# Altium PCB corePCB1nohighfreq.PcbDoc (part 2 of 3)
Units mil, origin at the board's own origin, x right, y up, seen from the top; angles counter-clockwise.
Board outline 3543.31 x 3543.31 mil, 4 copper layers (Top Layer, Layer 1, Layer 2, Bottom Layer), stack 23.756 mil thick; 90 components, 166 nets, 640 pads, 463 vias.
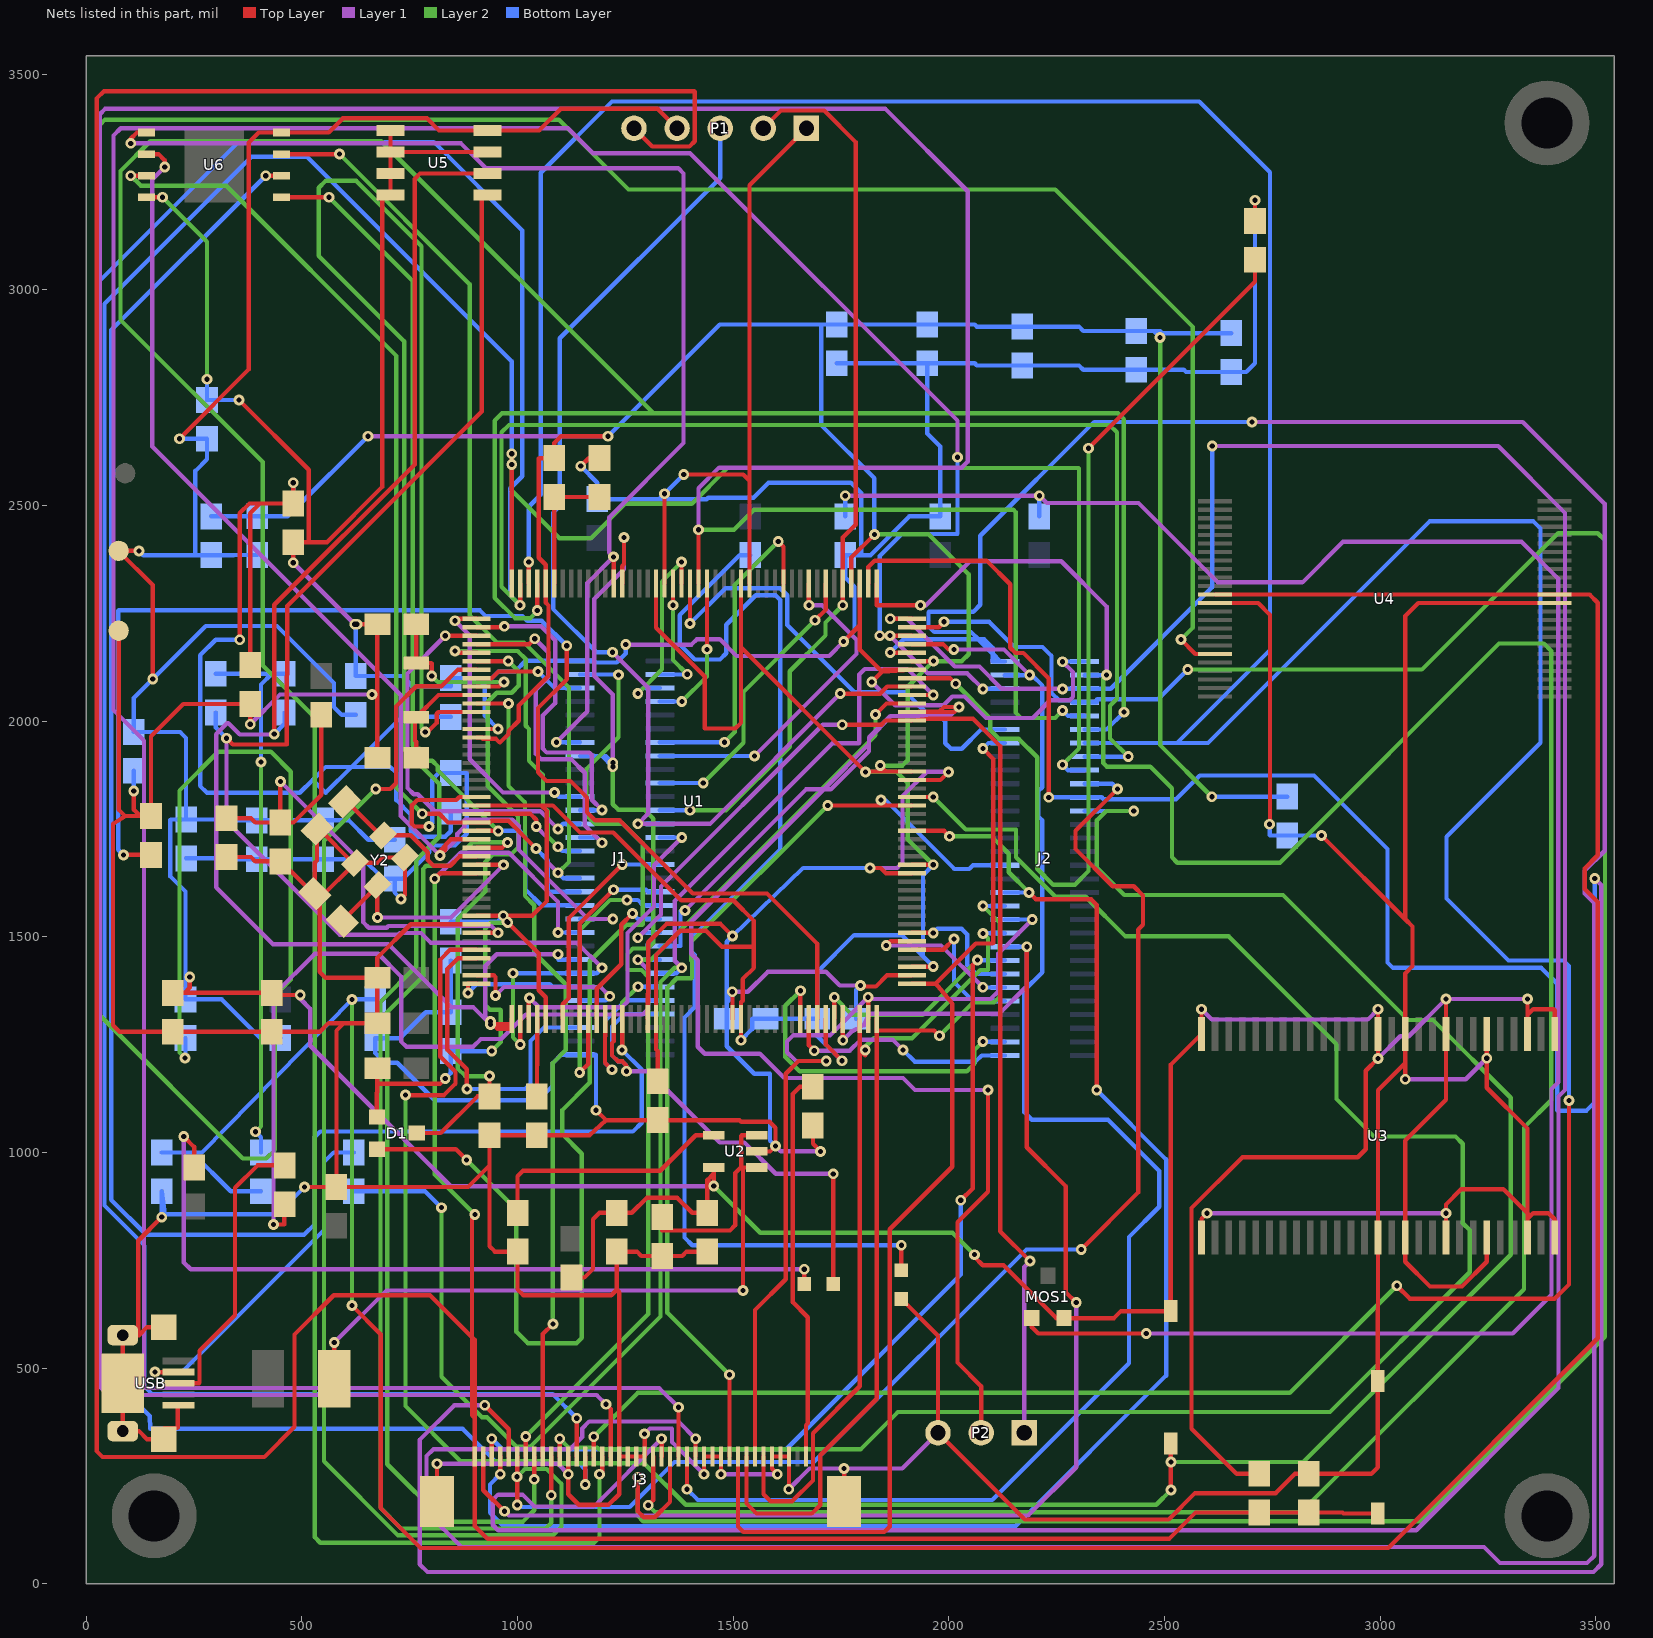
[diagram p4: the nets of this part, all layers, seen from the top]

## Via types
v1: diameter 25, hole 12, Top Layer to Bottom Layer, 463 vias

## Nets (pads, with @x,y where several pads share a name; then routed paths per layer and width w, separated by ;. In a path a pad name is that pad's centre, name@x,y a point inside that pad or via, vN(x,y) a via of type N, cw(c..) or ccw(c..) an arc to the next point about the centre after c; other vN are vias at no path point) (continued)
GND: C1.2 C2.1 C3.2 C4.1 C5.2 C6.1 C7.1 C8.1 C9.1 C10.1 C11.1 C12.2 C13.1 C14.1 C15.1 C16.1 C17.1 C18.1 C19.1 C20.1 C21.1 C22.1 C23.1 C24.1 C25.1 C26.1 C27.1 C28.1 C29.1 C30.1 C31.1 C32.1 C33.2 C34.2 C35.1 C36.1 C37.1 C38.1 C39.1 C40.1 C41.1 C42.1 C43.1 C44.2 C45.2 GND.1 J1.1 J1.30 J2.31 J3.3 J3.4 J3.5 J3.11 J3.12 J3.13 J3.20 J3.21 J3.22 J3.23 J3.29 J3.A J3.B P1.1 P2.3 PWR.2 R1.2 R4.2 R7.2 R14.1 RST.2 U1.14 U1.22 U1.37 U1.61 U1.71 U1.90 U1.102 U1.113 U1.126 U1.135 U1.148 U1.158 U2.2 U3.6 U3.12 U3.28 U3.41 U3.46 U3.52 U3.54 U4.13 U4.36 U5.1 U5.2 U5.3 U5.4 U5.7 U6.4 USB.5 USB.6 USB.7 USB.8 USB.9 Y2.2 Y2.4 | length 32670.2
  Top Layer w10: GND.1@75,2210 75,1795 90,1780 ; v1(110,1838) 110,1795 125,1780 ; U6.4@140,3215 v1(177,3215) ; v1(175.06,850) 120.5,795.44 120.5,576.22 ; USB.9@180,595 140.78,595 122,576.22 120.5,576.22 ; USB.5@214,413.82 212,413.82 212,362 211,361 180,361 USB.8@180,335 140.78,335 122,353.78 USB.7@84.65,353.78 84.65,409 85,409.35 USB.9@85,465 85,520 84.65,520.35 USB.6@84.65,576.22 120.5,576.22 ; C2.1@325.06,1685 382,1685 392,1675 C4.1@450.06,1675 452,1675 527.05,1599.95 C10.1@529.95,1599.95 529.95,1672 535.05,1677.09 C11.1@535.05,1749.95 540,1749.95 618.45,1671.5 Y2.4@623.5,1671.5 ; v1(354,2745) 516,2583 516,2416 515,2415 ; v1(380.06,1993) C26.1@380.06,2040 225,2040 150.06,1965.06 C3.2@150.06,1780 125,1780 ; v1(480,2367.5) C25.1@480,2415 515,2415 ; v1(506,920) C33.2@580.06,920 ; v1(622.56,2224.94) v1(627.5,2224.94) C8.1@675,2224.94 675,2074.5 ; v1(662.5,2062) 675,2074.5 ; C9.1@675,1914.94 675,2074.5 ; U5.1@705.59,3370 U5.2@705.59,3320 ; v1(730,1588) 739.03,1597.03 Y2.2@739.03,1684.03 687.53,1684.03 675,1671.5 Y2.4@623.5,1671.5 ; v1(795,1756) 761,1756 755,1762 755,1804.93 767.5,1817.43 857.93,1817.43 864.89,1824.39 U1.22@905.3,1824.39 ; J3.B@813.4,190.57 v1(813.4,278) ; U1.37@905.3,1529.11 752.26,1529.11 675,1451.86 C7.1@675,1404.94 ; U1.14@905.3,1981.87 954.87,1981.87 v1(955,1982) ; U5.7@930,3320 U5.2@705.59,3320 ; J3.29@1117.52,295 v1(1117.52,254) 1117.52,207.5 1142.04,182.98 1211.11,182.98 1235.63,207.5 J3.23@1235.63,295 ; v1(1146.47,2591.47) 1165,2610 R4.2@1190.06,2610 ; v1(1182,1098) 1205,1075 ; v1(1294.69,347.5) J3.20@1294.69,295 J3.21@1275,295 J3.22@1255.32,295 J3.23@1235.63,295 ; U1.61@1301.58,1310 1301.58,1368.06 1303,1369.48 1303,1487.5 1345.5,1530 1470.5,1530 v1(1498.5,1502) ; U1.158@1340.95,2319.09 v1(1340.95,2527.5) ; v1(1385.45,2572) 1523.3,2572 1537.8,2557.5 ; v1(1432.48,253.88) J3.13@1432.48,295 J3.12@1452.17,295 J3.11@1471.85,295 v1(1471.85,253.88) ; C32.1@1440.06,770 1392,770 1382,760 C29.1@1335.06,760 1287,760 1277,770 C31.1@1230.06,770 1230.06,681.56 ; v1(1498,1372.5) 1498.43,1372.07 U1.71@1498.43,1310 ; U1.148@1537.8,2319.09 1537.8,2557.5 ; U2.2@1555,1002.4 1585.5,1002.4 v1(1598,1014.9) 1598,1057.5 1584.5,1071 1518.5,1071 1514.5,1075 C17.1@1325.06,1075 1205,1075 ; v1(1602.46,253.88) 1589.96,266.38 J3.5@1589.96,295 J3.4@1609.65,295 J3.3@1629.33,295 1629.33,219.33 v1(1629,219) ; P1.1@1670,3375 1537.8,3242.8 1537.8,2557.5 ; C28.1@1685,1062.4 1685,1020 v1(1702.5,1002.5) ; v1(1756.2,2185) 1793.7,2222.5 ; J3.A@1757.28,190.57 v1(1757.28,267) ; U1.135@1793.7,2319.09 1793.7,2222.5 ; v1(1795,1387) 1797,1385 1830.93,1385 1856.93,1411 U1.90@1914.39,1411 ; v1(1817.01,1659.72) 1842.01,1659.72 1854.51,1647.22 U1.102@1914.39,1647.22 ; v1(1821.25,2091.25) 1844.83,2114.83 ; PWR.2@1890,660 1975,575 P2.3@1975,350 2176,149 2510,149 2571,210 2758,210 2803,255 C12.2@2835.06,255 2980,255 2995,270 RST.2@2995,470 2995,636 2995.51,636.51 U3.41@2995.51,802.56 2995.51,1144.23 3058.5,1207.22 ; U1.113@1914.39,1863.76 1980.53,1863.76 v1(1999.27,1882.5) ; U3.28@2586.06,802.56 2586.06,846.5 v1(2598.56,859) ; U4.13@2617.6,2274.05 2717.5,2274.05 2745,2246.55 2745,1762 v1(2744,1761) ; v1(2710,3208) 2710.06,3207.94 C5.2@2710.06,3160 ; v1(2864.46,1735) 3058.5,1540.96 ; v1(3058.5,1169.63) 3058.5,1207.22 ; U3.46@3152.99,802.56 v1(3152.99,859) 3152.99,879.51 3188.48,915 3285.94,915 3341.97,858.97 ; U3.6@3247.48,1275 v1(3247.48,1218.48) 3247.48,1150 3341.97,1055.51 3341.97,858.97 ; U3.52@3341.97,802.56 3341.97,845.94 ; U3.54@3404.96,802.56 3404.96,845 3390.99,858.97 3355,858.97 3348.48,852.45 ; U4.36@3405,2274.05 3088.56,2274.05 3058.5,2244 3058.5,1540.96 ; 90,1780 125,1780 ; 90,1780 62,1762 62,1295 77,1280 C42.1@200.06,1280 C43.1@430.06,1280 542,1280 561.94,1299.94 597.5,1299.94 ; 515,2415 558,2415 686,2543 686,3220 U5.4@705.59,3220 U5.3@705.59,3270 U5.2@705.59,3320 ; C33.2@580.06,920 580.06,1282.5 597.5,1299.94 ; C33.2@580.06,920 884.94,920 934.94,970 ; 597.5,1299.94 C6.1@675,1299.94 C7.1@675,1404.94 ; Y2.4@623.5,1671.5 541.06,1589.07 541.06,1418.87 555,1404.94 C7.1@675,1404.94 ; 934.94,970 C1.2@934.94,1040 R1.2@1044.94,1040 1167,1040 1205,1075 ; 934.94,970 934.94,782.5 947.44,770 C30.1@1000.06,770 1000.06,682.5 1013.56,669 1217.5,669 1230.06,681.56 ; 1230.06,681.56 1235.63,676 J3.23@1235.63,295 ; 1793.7,2222.5 1793.7,2165.96 1844.83,2114.83 ; 1844.83,2114.83 1849.67,2119.67 U1.126@1914.39,2119.67 1844.83,2114.83 ; 3058.5,1207.22 U3.12@3058.5,1275 3058.5,1415.12 3075.51,1432.13 3075.51,1523.96 3058.5,1540.96 ; 3341.97,845.94 3348.48,852.45 ; 3341.97,845.94 3341.97,858.97 ; 3341.97,858.97 3348.48,852.45
  Layer 1 w10: v1(380.06,1993) 449.06,2062 v1(662.5,2062) ; v1(480,2367.5) v1(622.56,2224.94) ; v1(813.4,278) 1093.52,278 v1(1117.52,254) ; v1(1250.86,2177.64) 1403.37,2177.64 1415.87,2190.14 1469.25,2190.14 1508,2151.39 1722.6,2151.39 v1(1756.2,2185) ; v1(1294.69,347.5) 1307.19,360 1357,360 1358,359 1358,328.36 v1(1432.48,253.88) ; v1(1471.85,253.88) v1(1602.46,253.88) ; v1(1498,1372.5) 1534.01,1372.5 1580.51,1419 1715,1419 1747,1387 v1(1795,1387) ; v1(1598,1014.9) 1610.4,1002.5 v1(1702.5,1002.5) ; v1(1629,219) 1677,267 v1(1757.28,267) 1892,267 P2.3@1975,350 ; v1(1817.01,1659.72) 1880.22,1659.72 1892.5,1672 1892.5,1826.26 1948.74,1882.5 v1(1999.27,1882.5) ; v1(1821.25,2091.25) 1875.5,2037 1988,2037 2008.24,2057.24 2036.53,2057.24 2086.27,2007.5 2194.5,2007.5 2235.44,2048.44 2279.94,2048.44 2288,2056.5 2288,2114 v1(2264,2138) ; v1(2598.56,859) v1(3152.99,859) ; v1(3058.5,1169.63) 3198.63,1169.63 v1(3247.48,1218.48)
  Layer 2 w10: v1(177,3215) 280,3112 v1(280,2793)
  Bottom Layer w10: v1(110,1838) C37.1@110,1885 ; v1(175.06,850) C36.1@175.06,910 182.06,857 443,857 v1(506,920) ; C38.1@231.38,1681.93 312,1681.93 313.93,1680 C39.1@394.94,1680 C40.1@549.94,1680 643,1680 688,1635 C41.1@714.94,1635 ; v1(280,2793) 279.94,2792.94 C44.2@279.94,2745 v1(354,2745) ; v1(627.5,2224.94) 624.94,2222.37 C45.2@624.94,2105 732,2105 755.77,2081.23 845.06,2081.23 C13.1@845.06,2100 906.5,2100 ; v1(730,1588) 714.94,1603.06 C41.1@714.94,1635 ; v1(795,1756) 802.5,1763.5 802.5,1865 817.5,1880 C14.1@845.06,1880 881,1880 882,1879 882,1739 855,1712 797,1712 796,1711 796,1696 735,1635 C41.1@714.94,1635 ; C15.1@844.94,1445 844.94,1371.72 845.06,1371.6 C16.1@845.06,1325 787,1325 727,1265 C35.1@670.06,1265 670.06,1230.44 692.5,1208 721,1208 808,1121 1048,1121 1082,1155 1082,1207.5 1101.11,1226.61 J1.1@1144.96,1226.61 1181,1226.61 1182,1225.61 v1(1182,1098) ; v1(955,1982) 924,2013 924,2082.5 906.5,2100 ; v1(1146.47,2591.47) 1184.94,2553 R7.2@1184.94,2515 1328.45,2515 ; v1(1250.86,2177.64) 1250.86,2156.86 1230,2136 1178,2136 1178,2140 J1.30@1144.96,2140 1019,2140 994.21,2115.21 955.78,2115.21 940.57,2100 906.5,2100 ; v1(1385.45,2572) v1(1340.95,2527.5) 1328.45,2515 ; v1(1498,1372.5) 1498,1361 1485,1348 ; v1(1498.5,1502) 1485,1488.5 ; v1(1598,1014.9) 1585.5,1027.4 1585.5,1182.5 1549,1182.5 1485,1246.5 C18.1@1485,1310.06 1485,1348 ; C20.1@1740,2830 C21.1@1949.94,2830 ; v1(1756.2,2185) 1781.2,2210 1781.2,2311.8 1760.06,2332.94 R14.1@1760.06,2385 1796,2385 ; C19.1@1785,1309.94 1785,1377 v1(1795,1387) ; v1(1817.01,1659.72) 1662.22,1659.72 1498.73,1501.76 1485,1488.5 ; v1(2264,2138) 2264.43,2138.43 J2.31@2315.04,2138.43 ; v1(2710,3208) 2710,2830 2690,2810 C24.1@2655,2810 2550,2810 2545,2815 C23.1@2434.94,2815 2312,2815 2302,2825 C22.1@2170,2825 2065,2825 2060,2830 C21.1@1949.94,2830 ; v1(2744,1761) 2744,1736 2745,1735 C27.1@2785,1735 v1(2864.46,1735) ; 1328.45,2515 1439,2515 1442,2518 1547,2518 1582,2553 1773,2553 1797,2529 1797,2386 1796,2385 ; 1485,1348 1485,1372.5 1485,1488.5 ; 1796,2385 1818.25,2385 1908.25,2475 C34.2@1980.06,2475 1980.06,2637 1949.94,2667.13 C21.1@1949.94,2830
IIC_SCL: J1.8 R20.1 U1.45 U5.6 | length 3442
  Top Layer w10: v1(436,1970) 436,2270 761.5,2595.5 761.5,3257.5 774,3270 U5.6@930,3270 ; v1(937,1297) v1@943.5,1297 ; v1(937,1303.5) v1@943.5,1297 ; U1.45@986.61,1310 U1.45@986.61,1297 ; v1@943.5,1297 U1.45@986.61,1297 ; v1@943.5,1297 953.5,1287 986.61,1287 U1.45@986.61,1297
  Layer 1 w10: v1(436,1970) 435,1969 356,1969 329,1996 327,1996 301,1970 301,1615 433,1483 700.43,1483 846.43,1337 897,1337 v1(937,1297) ; v1(937,1303.5) 925,1315.5 925,1432.5 952,1459.5 v1(1094,1459.5)
  Bottom Layer w10: v1(436,1970) 459.94,1993.94 R20.1@459.94,2020 ; v1(1094,1459.5) 1094,1448.09 1095,1447.09 J1.8@1144.96,1447.09
IIC_SDA: J1.7 R21.1 U1.46 U5.5 | length 3341.2
  Top Layer w10: v1(325,1960.5) 339.5,1946 465,1946 466,2267 917,2718 917,3220 U5.5@930,3220 ; v1(1006.3,1250.12) U1.46@1006.3,1310
  Layer 1 w10: v1(325,1960.5) 325,1768 588,1505 723.07,1505 727.07,1509 776,1509 799.07,1485.93 1138.16,1485.93 v1(1196,1428.09)
  Layer 2 w10: v1(989.5,1415.59) 989.5,1266.92 v1(1006.3,1250.12)
  Bottom Layer w10: R21.1@300.06,2020 300.06,1985.44 v1(325,1960.5) ; v1(989.5,1415.59) J1.7@1144.96,1415.59 1183.5,1415.59 v1(1196,1428.09)
JTCK: J1.42 P1.2 U1.137 | length 2088.7
  Top Layer w10: P1.2@1570,3375 1611,3416 1711,3416 1784,3343 1784,2455.67 1754.33,2426 U1.137@1754.33,2319.09 1754.33,2269.33 v1(1754,2269)
  Layer 2 w10: v1(1400,1793.54) 1483.54,1793.54 1631,1941 1631,2116 1714,2199 1714,2229 v1(1754,2269)
  Bottom Layer w10: J1.42@1330,1793.54 v1(1400,1793.54)
JTMS: J1.43 P1.3 U1.124 | length 2714.7
  Top Layer w10: v1(1748.5,2064) 1841,2064 1857.3,2080.3 U1.124@1914.39,2080.3
  Layer 1 w10: v1(1220,2160) 1303,2077 1303,1786 v1(1279,1762) 1446.5,1762 v1(1748.5,2064)
  Bottom Layer w10: v1(1220,2160) 1183,2160 1082.5,2260.5 1082.5,2483.46 1098,2498.96 1098,2888 1470,3260 P1.3@1470,3375 ; v1(1279,1762) v1(1279,1762) J1.43@1330,1762.05
KEY0: J1.6 U1.44 | length 312.3
  Top Layer w10: v1(885,1370) 885,1391.32 U1.44@905.3,1391.32
  Bottom Layer w10: v1(885,1370) 905,1390 1075,1390 1080.91,1384.09 J1.6@1144.96,1384.09
KEY1: J1.5 U1.43 | length 443.3
  Top Layer w10: U1.43@905.3,1411 945,1411 949,1407 v1(949,1364)
  Layer 1 w10: v1(949,1364) 968.5,1383.5 1192.5,1383.5 v1(1214,1362)
  Bottom Layer w10: J1.5@1144.96,1352.6 1204.6,1352.6 v1(1214,1362)
KEY2: J1.28 U1.8 | length 261.8
  Top Layer w10: U1.8@905.3,2099.98 940.55,2099.98 955.78,2115.21 v1(1047.72,2115.21)
  Bottom Layer w10: v1(1047.72,2115.21) 1085.92,2077.01 J1.28@1144.96,2077.01
LCD_B3: J2.35 J3.24 U1.154 | length 9261.5
  Top Layer w10: v1(1204.95,416) 1215.95,405 J3.24@1215.95,295 ; U1.154@1419.69,2319.09 v1(1419.69,2444)
  Layer 1 w10: v1(1204.95,416) 1183.45,437.5 51,437.5 31,457.5 31,3407.5 43.5,3420 1853,3420 2044,3229 2044,2602 2030,2588 1467.5,2588 1419.69,2540.19 v1(1419.69,2444)
  Layer 2 w10: v1(1419.69,2444) 1502,2444 1548.5,2490.5 2149.5,2490.5 2155,2485 2155,2020 2167.5,2007.5 2246.56,2007.5 v1(2264,2024.94)
  Bottom Layer w10: v1(2264,2024.94) 2276.5,2012.44 J2.35@2315.04,2012.44
LCD_B4: J2.36 J3.25 U1.173 | length 8599.7
  Top Layer w10: v1(1045.67,2256.61) U1.173@1045.67,2319.09 ; v1(1190,254) 1196.26,260.26 J3.25@1196.26,295
  Layer 2 w10: v1(1045.67,2256.61) 1045.67,2254.67 1030,2239 994,2239 947,2286 947,2697 964,2714 1315,2714 ; v1(1190,254) 1190,107.5 1177.5,95 542.5,95 530,107.5 530,2008 409,2129 409,2601 79.5,2930.5 79.5,3276 148.5,3345 684,3345 1315,2714 ; v1(2406,2021) 2406,2700.5 2392.5,2714 1315,2714
  Bottom Layer w10: J2.36@2315.04,1980.94 2365.94,1980.94 v1(2406,2021)
LCD_B5: J2.37 J3.26 U1.174 | length 9995.6
  Top Layer w10: U1.174@1025.99,2319.09 v1(1026,2369) ; J3.26@1176.58,295 v1(1176.58,340.58) ; v1(3039,691) 3069,661 3405,661 3438,694 v1(3438,1120.5)
  Layer 2 w10: v1(1176.58,340.58) 1279,443 2791,443 v1(3039,691)
  Bottom Layer w10: v1(1026,2369) 1026,2497.5 1054,2525.5 1054,3272 1219,3437 2581,3437 2745,3273 2745,2165 2529.45,1949.45 ; J2.37@2315.04,1949.45 2529.45,1949.45 ; v1(3438,1120.5) 3438,1432.5 3425.5,1445 3298,1445 3154,1589 3154,1732 3372,1950 3372,2447 3355,2464 3115.55,2464 2601,1949.45 2529.45,1949.45
LCD_B6: J2.38 J3.27 U1.175 | length 8737.5
  Top Layer w10: v1(1006,2269) 1006.3,2269.3 U1.175@1006.3,2319.09 ; v1(1156.89,230) J3.27@1156.89,295
  Layer 2 w10: v1(1006,2269) 963,2312 963,2670 980,2687 2373,2687 2390,2670 2390,2052 2374,2036 2374,1959.95 v1(2416,1917.95)
  Bottom Layer w10: v1(1006,2269) 983.25,2291.75 983.25,2540.25 1011,2568 1011,3138 806,3343 353,3343 26,3016 26,510 147,389 148,359 873,359 952.39,279.61 1142.5,279.61 1156.89,265.22 v1(1156.89,230) ; J2.38@2315.04,1917.95 v1(2416,1917.95)
LCD_B7: J2.39 J3.28 U1.176 | length 7716.2
  Top Layer w10: U1.176@986.61,2319.09 v1(986.61,2595) v1(986.61,2620.39) ; J3.28@1137.21,295 v1(1137.21,383.79)
  Layer 2 w10: v1(986.61,2595) 986.61,2534.89 1097,2424.5 1170,2424.5 1249.5,2504 1404,2504 1487,2587 2301,2587 2302,2586 2302,1936.96 v1(2264,1898.96)
  Bottom Layer w10: v1(986.61,2620.39) 986.61,2834.39 512,3309 383,3309 42,2968 42,877 135,784 135,457.5 153.5,439 1082,439 v1(1137.21,383.79) ; v1(2264,1898.96) 2276.5,1886.46 J2.39@2315.04,1886.46
LCD_BL: J1.23 J3.34 U1.163 | length 2688.7
  Top Layer w10: J3.34@1019.1,295 v1(1019.1,341.5) ; U1.163@1242.52,2319.09 1242.52,2359.52 1247,2364 v1(1247,2426.09)
  Layer 1 w10: v1(1221,1894.53) v1(1221,1903.53) 1221,2062 1178,2105 1178,2283.5 1247,2352.5 v1(1247,2426.09)
  Layer 2 w10: v1(1019.1,341.5) 1303,625.4 1303,1407.5 1287.5,1423 1256,1423 1255,1424 1255,1460.5 1267.5,1473 1302,1473 1315,1486 1315,1774 1294,1795 1233.5,1795 1221,1807.5 v1(1221,1894.53) v1(1221,1903.53)
  Bottom Layer w10: J1.23@1144.96,1919.53 1196,1919.53 ; v1(1221,1894.53) 1196,1919.53 ; v1(1221,1903.53) 1205,1919.53 1196,1919.53
LCD_CLK: J3.30 U1.111 | length 4358.3
  Top Layer w10: J3.30@1097.84,295 1097.84,335.84 v1(1098,336) ; U1.111@1914.39,1824.39 v1(1964,1824.39)
  Layer 2 w10: v1(1098,336) 1118,316 1185,316 1189.5,311.5 1795.5,311.5 1882,398 2884,398 3208,722 3208,820 3192,836 3192,1020 3175,1037 2986,1037 2899,1124 2899,1251 2649,1501 2409.63,1501 2317.63,1593 2247.37,1593 2156,1684.37 2156,1748 2155,1749 2039.39,1749 v1(1964,1824.39)
LCD_DE: J3.33 U1.28 | length 2244.8
  Top Layer w10: U1.28@905.3,1706.28 964.28,1706.28 v1(977,1719) ; v1(1038.78,242) J3.33@1038.78,295
  Layer 2 w10: v1(977,1719) 895,1719 840.97,1664.97 788.47,1664.97 781,1657.5 781,1408.5 698,1325.5 698,277 831,144 1012.5,144 1038.78,170.28 v1(1038.78,242)
LCD_G2: J2.30 J3.14 U1.128 | length 8613.7
  Top Layer w10: J3.14@1412.8,295 1412.8,335.8 v1(1413,336) ; v1(1864.41,2159.04) U1.128@1914.39,2159.04
  Layer 1 w10: v1(1413,336) 1373,376 1166,376 1150,360 1150,340 1122,312 805,312 789,296 789,165.83 869.83,85 3241,85 3278,48 3480,48 3497,65 3497,1577.5 3474,1600.5 3474,1652.5 3521,1699.5 3521,2504 3331,2694 v1(2703,2694)
  Bottom Layer w10: v1(1864.41,2159.04) 1895.37,2190 2068.43,2190 ; J2.30@2130,2138.43 J2.30@2120,2138.43 ; v1(2703,2694) 2337,2694 2073,2430 2073,2270 2057,2254 1954,2254 1953,2253 1953,2220 1966,2207 2051.43,2207 2068.43,2190 ; 2068.43,2190 2102,2156.43 ; 2068.43,2190 2082,2190 2102,2170 2102,2156.43 ; 2102,2156.43 J2.30@2120,2138.43 ; 2102,2156.43 2102,2138.43 J2.30@2120,2138.43
LCD_G3: J2.29 J3.15 U1.129 | length 3500.9
  Top Layer w10: v1(1393.11,219) J3.15@1393.11,295 ; U1.129@1914.39,2178.72 1986.77,2178.72 1999.27,2166.22 v1(2011.77,2166.22)
  Layer 1 w10: v1(2011.77,2166.22) 2128.21,2166.22 v1(2187.5,2106.93)
  Bottom Layer w10: v1(1393.11,219) 1418.11,194 2101,194 2418,511 2418,804 2488,874 2488,957 2369,1076 2192.5,1076 2175,1093.5 2175,1376 2217,1418 2217,1770 2208,1779 2208,1838 2217,1847 2217,2082.5 2192.57,2106.93 v1(2187.5,2106.93) J2.29@2130,2106.93
LCD_G4: J2.28 J3.16 U1.130 | length 7588.8
  Top Layer w10: v1(1373,409) 1373.43,408.57 J3.16@1373.43,295 ; v1(1840,2198.41) v1(1864,2198.41) U1.130@1914.39,2198.41
  Layer 1 w10: v1(1373,409) 1328.27,453.73 136.27,453.73 134,456 134,1955 63,2026 63,3358 80,3375 1117,3375 1175,3317 1400,3317 2020,2697 v1(2020,2612) ; v1(1864,2198.41) 1951.43,2110.98 2043.02,2110.98 v1(2079,2075)
  Bottom Layer w10: v1(1840,2198.41) 1840,2383 1891,2434 2019,2434 2020,2435 v1(2020,2612) ; v1(2079,2075) 2079.43,2075.43 J2.28@2130,2075.43
LCD_G5: J2.34 J3.17 U1.131 | length 6553.9
  Top Layer w10: v1(1279,247) 1279,167.5 1292.5,154 1318,154 1353.74,189.74 J3.17@1353.74,295 ; U1.131@1914.39,2218.09 1976.59,2218.09 v1(1989,2230.5)
  Layer 2 w10: v1(1279,247) 1279,157.5 1291.5,145 3094,145 3521.5,572.5 3521.5,2419.5 3505,2436 3413,2436 3097,2120 v1(2554,2120)
  Bottom Layer w10: v1(1989,2230.5) 2093.5,2230.5 2152,2172 2217.5,2172 2238,2151.5 2238,2065.44 2255,2048.44 2283,2048.44 2287.5,2043.94 J2.34@2315.04,2043.94 2343,2043.94 2343,2050 2344,2051 2485,2051 v1(2554,2120)
LCD_G6: J2.33 J3.18 U1.132 | length 7391.2
  Top Layer w10: J3.18@1334.06,295 v1(1334.06,336) ; v1(1864.41,2237.78) U1.132@1914.39,2237.78
  Layer 1 w10: v1(1334.06,336) 1177.06,179 1039,179 1011.5,206.5 955,206.5 942.5,194 942.5,136.5 955,124 3084,124 3413.78,453.78 3413.78,1129.78 3429,1145 3429,2483 3274,2638 v1(2611,2638) ; v1(1864.41,2237.78) 1903.22,2237.78 2014.02,2126.98 2071.02,2126.98 2123,2075 v1(2263.57,2075)
  Bottom Layer w10: v1(2263.57,2075) 2264,2075.43 J2.33@2315.04,2075.43 2375.43,2075.43 2611,2311 v1(2611,2638)
LCD_G7: J2.32 J3.19 U1.133 | length 6407.5
  Top Layer w10: v1(1303,182) 1314.37,193.37 J3.19@1314.37,295 ; U1.133@1833.07,2319.09 1833.07,2269.11 1833.19,2269 v1(1934.5,2269)
  Layer 1 w10: v1(1934.5,2269) 1947,2269 2049,2371 2261,2371 2366,2266 v1(2366,2107)
  Layer 2 w10: v1(1303,182) 1319,166 2817,166 3334,683 3334,1058 3397,1121 3397,2163 3380,2180 3276,2180 2767.96,1671.96 2530,1671.96 2517.5,1684.46 2517.5,1844.45 2467.5,1894.45 2366.55,1894.45 2358,1903 2358,2099 v1(2366,2107)
  Bottom Layer w10: J2.32@2315.04,2106.93 2365.93,2106.93 v1(2366,2107)
LCD_HSYNC: J3.31 U1.12 | length 5397.7
  Top Layer w10: v1(786,1975) 791.5,1975 812.35,1995.85 812.35,2017.56 816.03,2021.24 U1.12@905.3,2021.24 ; v1(1078,205) 1078.15,205.15 J3.31@1078.15,295
  Layer 2 w10: v1(786,1975) 777.5,1983.5 777.5,3101.5 626,3253 555,3253 539,3237 539,3079 737,2881 737,1936 818.5,1854.5 818.5,1732 765,1678.5 765,1431.83 682,1348.83 682,176 730,128 1065,128 1078,141 v1(1078,205)
LCD_R3: J2.10 J3.6 U1.86 | length 1880.6
  Top Layer w10: J3.6@1570.28,295 1570.28,207.5 1586.78,191 1636.5,191 1685,239.5 1685,349 1793.7,457.7 v1@1793.7,1237.62 ; U1.86@1793.7,1310 v1@1793.7,1237.62 ; v1(1806.2,1237.62) 1806.2,1225.12 v1@1793.7,1237.62
  Layer 2 w10: v1(1806.2,1237.62) 1806.2,1245 1825.96,1264.76 1914.76,1264.76 2073,1423 2090,1423 2091,1424 2091,1496.5 v1(2079.5,1508)
  Bottom Layer w10: v1(2079.5,1508) 2080,1508.5 J2.10@2130,1508.5
LCD_R4: J2.11 J3.7 U1.87 | length 1999.7
  Top Layer w10: J3.7@1550.59,295 1550.59,634.59 1622,706 1622,1182.5 1651.5,1212 v1(1716,1212) ; v1(1813,1360) 1813,1356 U1.87@1813.39,1310
  Layer 1 w10: v1(1716,1212) 1645.5,1212 1625,1232.5 1625,1257.5 1639,1271.5 1724.5,1271.5 v1(1813,1360) ; v1@1813,1356 2097,1356 2115,1374 2115,1461.5 v1(2193.5,1540)
  Bottom Layer w10: J2.11@2130,1540 v1(2193.5,1540)
LCD_R5: J2.12 J3.8 U1.88 | length 2085
  Top Layer w10: J3.8@1530.91,295 1530.91,186.32 1554.22,163 1682.5,163 1702,182.5 1702,298 1833.07,429.07 U1.88@1833.07,1283 ; U1.88@1833.07,1310 U1.88@1833.07,1283 ; v1(1978.5,1270.5) 1966,1283 U1.88@1833.07,1283
  Layer 2 w10: v1(1978.5,1270.5) 2056,1348 2105,1348 2118.5,1361.5 2118.5,1532 v1(2079,1571.5)
  Bottom Layer w10: v1(2079,1571.5) J2.12@2130,1571.5
LCD_R6: J2.24 J3.9 U1.89 | length 2602.5
  Top Layer w10: J3.9@1511.22,295 1511.22,132.5 1523.72,120 1850.5,120 1863,132.5 1863,822 2008,967 2008,1345 1969.32,1391.32 ; U1.89@1914.39,1391.32 1969.32,1391.32 ; v1(2079,1936.5) 2103,1912.5 2103,1485.5 2102,1484.5 2062.5,1484.5 1969.32,1391.32
  Bottom Layer w10: v1(2079,1936.5) 2091.95,1949.45 J2.24@2130,1949.45
LCD_R7: J2.15 J3.10 U1.110 | length 2315.7
  Top Layer w10: J3.10@1491.54,295 v1(1491.54,484.46) ; v1(1719.21,1804.71) 1855.29,1804.71 ; v1(1842.5,1817.5) 1855.29,1804.71 ; U1.110@1914.39,1804.71 1855.29,1804.71
  Layer 2 w10: v1(1491.54,484.46) 1347.5,628.5 1347.5,1382.5 1369,1404 1403.46,1404 1404.46,1405 1404.46,1443.18 1402.48,1445.16 1402.48,1487.98 v1(1719.21,1804.71)
  Bottom Layer w10: v1(1842.5,1817.5) 1853,1817.5 2013,1657.5 2047.5,1657.5 2055.98,1665.98 J2.15@2130,1665.98
LCD_VSYNC: J3.32 U1.11 | length 1896.9
  Top Layer w10: U1.11@905.3,2040.93 v1(979,2040.93) ; J3.32@1058.47,295 1058.47,578.97 v1(1082,602.5)
  Layer 2 w10: v1(979,2040.93) 979,1850 1017.17,1811.83 1017.17,1595.04 1038.76,1573.46 1038.76,1463.24 1112,1390 1112,1237.5 1082,1207.5 v1(1082,602.5)
LED0: DS0.2 J1.57 U1.57 | length 1222.2
  Top Layer w10: U1.57@1222.84,1310 1222.84,1257.82 1219.02,1254 1219.02,1224.98 1232.72,1211.28 1242.5,1211.28 1252.78,1201 v1(1252.78,1188.5) ; DS0.2@1731.93,695 v1(1731.93,950.4)
  Layer 1 w10: v1(1252.78,1188.5) 1303.27,1188.5 1468.77,1023 1526,1023 1598.6,950.4 v1(1731.93,950.4)
  Bottom Layer w10: v1(1252.78,1188.5) 1252.78,1201 1242.5,1211.28 1232.72,1211.28 1219.02,1224.98 1219.02,1292.02 1248.1,1321.1 J1.57@1330,1321.1
LED1: J1.56 U1.56 | length 391
  Top Layer w10: U1.56@1203.15,1310 1203.15,1269.5 1203.02,1269.37 1203.02,1207.98 v1(1219,1192)
  Bottom Layer w10: v1(1219,1192) 1203.02,1207.98 1203.02,1305.02 1250.6,1352.6 J1.56@1330,1352.6
NetC1_1: C1.1 D1.3 U1.6 | length 1521.7
  Top Layer w10: D1.3@766.26,1045 822,1045 907,1130 C1.1@934.94,1130 v1(934.94,1177) ; U1.6@905.3,2139.35 v1(978.65,2139.35)
  Layer 2 w10: v1(934.94,1177) 879,1177 861,1195 861,1541 925,1605 925,1673.5 942.5,1691 984.5,1691 1001,1707.5 1001,1779.76 931,1849.76 931,2045 952,2066 986.5,2066 1003,2082.5 1003,2115 v1(978.65,2139.35)
NetC2_2: C2.2 C4.2 R2.1 U1.38 | length 1313
  Top Layer w10: C2.2@325.06,1775 382,1775 392,1765 C4.2@450.06,1765 ; v1(450.06,1860) C4.2@450.06,1765 ; R2.1@545.06,2015 545.06,1829.56 480.5,1765 C4.2@450.06,1765 ; U1.38@905.3,1509.43 v1(955,1509.43)
  Layer 1 w10: v1(450.06,1860) 642.5,1667.56 642.5,1533.5 655,1521 696.5,1521 700.5,1525 939.43,1525 v1(955,1509.43)
NetC3_1: C3.1 U1.81 | length 3036.6
  Top Layer w10: v1(86,1690) C3.1@150.06,1690 ; v1(1114,2175) 1114,2097.02 1047.5,2030.52 1047.5,1881.5 1067.5,1861.5 1122.5,1861.5 1161,1823 1161,1789.05 1180,1770.05 1236.95,1770.05 1406.33,1600.67 1578.33,1600.67 1695.28,1483.72 U1.81@1695.28,1310
  Bottom Layer w10: v1(86,1690) 74,1702 74,2256 75,2257 913,2257 926,2244 1011.28,2244 1022.17,2233.11 1055.89,2233.11 v1(1114,2175)
NetC5_1: C5.1 U1.125 | length 2366
  Top Layer w10: U1.125@1914.39,2099.98 2003.02,2099.98 v1(2016,2087) ; v1(2324,2633) 2710.06,3019.06 C5.1@2710.06,3070
  Layer 2 w10: v1(2016,2087) 2096.5,2006.5 2096.5,1979 2116,1959.5 2162,1959.5 2205,1916.5 2205,1658 2242,1621 2292.5,1621 2324,1652.5 v1(2324,2633)
NetC8_2: C8.2 U1.9 Y1.1 | length 395.9
  Top Layer w10: C8.2@765,2224.94 Y1.1@765,2135 800,2135 801,2134 v1(801,2105) ; U1.9@905.3,2080.3 957.59,2080.3 v1(968.3,2091)
  Layer 2 w10: v1(801,2105) 815,2091 v1(968.3,2091)
NetC9_2: C9.2 U1.10 Y1.2 | length 260
  Top Layer w10: C9.2@765,1914.94 765,1952.25 762,1955.25 762,2009.02 Y1.2@765,2009.02 816.59,2060.61 U1.10@905.3,2060.61
NetC10_2: C10.2 U1.30 Y2.1 | length 596
  Top Layer w10: C10.2@593.59,1536.32 593.59,1537 Y2.1@675,1618.41 ; v1(675,1545) Y2.1@675,1618.41 ; Y2.1@675,1620 Y2.1@675,1618.41 ; U1.30@905.3,1666.91 v1(967.5,1666.91)
  Layer 1 w10: v1(675,1545) 845.59,1545 v1(967.5,1666.91)
NetC11_2: C11.2 U1.29 Y2.3 | length 387.5
  Top Layer w10: C11.2@598.68,1813.59 604,1813.59 682.06,1735.53 Y2.3@687.53,1735.53 752.17,1735.53 791.72,1695.98 791.72,1678.25 805,1664.97 843.92,1664.97 865.55,1686.59 U1.29@905.3,1686.59
NetC28_2: C28.2 J3.1 | length 910.7
  Top Layer w10: J3.1@1668.7,295 1668.7,367.73 1673,372.03 1673,618 1638,653 1638,1135.4 1655,1152.4 C28.2@1685,1152.4
NetC29_2: C29.2 F1.2 U2.1 U2.3 | length 1861.4
  Top Layer w10: F1.2@575,475 v1(575,559) ; C29.2@1335.06,850 1335.06,819.5 1335.56,819 1492.5,819 1505,831.5 1505,952.5 1517.5,965 1523,965 ; v1(1523,680) 1523,965 ; U2.1@1555,965 1523,965 ; U2.3@1555,1039.8 1520,1039.8 1518.5,1038.3 1518.5,969.5 1523,965
  Layer 1 w10: v1(575,559) 696,680 v1(1523,680)
NetC30_2: C30.2 U2.4 | length 579.2
  Top Layer w10: C30.2@1000.06,860 1000.06,945 1012.56,957.5 1330.89,957.5 1413.2,1039.8 U2.4@1455,1039.8
NetC35_2: C35.2 C36.2 R16.1 U4.12 U4.37 | length 7736.9
  Top Layer w10: v1(616.06,645) 682.5,578.56 682.5,175.5 775,83 3019,83 3505,569 3505,1580.62 3474.5,1611.12 3474.5,1658.5 3505,1689 3505,2274.74 3486,2293.74 U4.37@3405,2293.74 U4.12@2617.6,2293.74
  Layer 2 w10: v1(616.06,645) v1(616.06,1355)
  Bottom Layer w10: C36.2@175.06,1000 245,1000 ; R16.1@405.06,910 335,910 245,1000 ; C35.2@670.06,1355 v1(616.06,1355) 268,1000 245,1000
NetDS0_1: DS0.1 R10.2 | length 1853.6
  Top Layer w10: v1(226,1037) 250,1013 R10.2@250,965 ; DS0.1@1665,695 v1(1665,729)
  Layer 1 w10: v1(226,1037) 226,745 242,729 v1(1665,729)
NetMOS1_1: MOS1.1 R13.2 R14.2 | length 4843.1
  Top Layer w10: MOS1.1@2192.6,615.79 2192.6,595 2207.6,580 v1(2458,580)
  Layer 1 w10: v1(1760.06,2523) v1(2210,2523) 2227,2506 2440,2506 2624,2322 2820,2322 2914,2416 3328,2416 3413,2331 3413,1162.55 3397.78,1147.33 3397.78,670 3307.78,580 v1(2458,580)
  Bottom Layer w10: R14.2@1760.06,2475 v1(1760.06,2523) ; v1(2210,2523) 2210.06,2522.94 R13.2@2210.06,2475
NetPWR_1: PWR.1 R15.1 | length 2787.6
  Top Layer w10: PWR.1@1890,726.93 v1(1890,785)
  Bottom Layer w10: R15.1@1540.06,2385 1515,2385 1376,2246 1376,2178 1411,2143 1469.5,2143 1484,2157.5 1484,2223.64 1552.36,2292 1598.22,2292 1609.22,2281 1609.22,1702.22 1403,1496 1403,1466 1411,1458 1411,1337 1387,1313 1387,803 1405,785 v1(1890,785)
NetR1_1: R1.1 U1.48 | length 180.3
  Top Layer w10: R1.1@1044.94,1130 1044.94,1201.94 1045.67,1202.67 U1.48@1045.67,1310
NetR4_1: R4.1 R5.1 U1.171 | length 305.9
  Top Layer w10: U1.171@1085.04,2319.09 1085.04,2419 R5.1@1085.06,2520 R4.1@1190.06,2520
NetR11_2: R11.2 USB.3 | length 671.6
  Top Layer w10: USB.3@214,465 261.4,465 262.4,466 262.4,540 345,622.6 345,918 397,970 R11.2@460.06,970
NetR12_2: R12.2 USB.2 | length 819.3
  Top Layer w10: v1(159,491) 159.41,490.59 USB.2@214,490.59
  Bottom Layer w10: v1(159,491) 222.08,491 551.08,820 551.08,977.58 573.5,1000 R12.2@620,1000
NetR18_1: R18.1 U4.19 | length 8064.1
  Top Layer w10: v1(2538.18,2189.18) 2571.41,2155.94 U4.19@2617.6,2155.94
  Layer 2 w10: v1(229.04,1218.96) 216,1232 216,1839 306,1929 428,1929 474,1883 474,1401 437.5,1364.5 437.5,1006 417.5,986 363,986 31,1318 31,3382.5 43.5,3395 1095.5,3395 1257.5,3233 2247,3233 2566,2914 2566,2217 v1(2538.18,2189.18)
  Bottom Layer w10: v1(229.04,1218.96) 230.06,1219.98 R18.1@230.06,1265
NRF_CE: J2.25 U1.155 | length 1099.4
  Top Layer w10: v1(1400,2226.58) U1.155@1400,2319.09
  Bottom Layer w10: v1(1400,2226.58) 1481.92,2308.5 1608.72,2308.5 1625.22,2292 1625.22,2223 1780.72,2067.5 1899.87,2067.5 1961.87,2005.5 1986,2005.5 1992,1999.5 1992,1949 2005,1936 2030,1936 2074.94,1980.94 J2.25@2130,1980.94
NRF_CS: J1.34 U1.153 | length 348.8
  Top Layer w10: v1(1439.37,2166.64) U1.153@1439.37,2319.09
  Layer 2 w10: v1(1381,2045.51) 1439.37,2103.88 v1(1439.37,2166.64)
  Bottom Layer w10: J1.34@1330,2045.51 v1(1381,2045.51)
PA0: J2.42 U1.40 WKUP.1 | length 6086.6
  Top Layer w10: v1(740,1133) 829.5,1133 856.06,1159.56 856.06,1186.94 821,1222 821,1447.5 843.56,1470.06 U1.40@905.3,1470.06 ; v1(2515,217) v1(2515,282) WKUP.1@2515,325
  Layer 2 w10: v1(740,1133) 740,412 868,284 1072.61,284 1077.11,279.5 1293.5,279.5 1390,183 2481,183 v1(2515,217) ; v1(2429,1792) 2365,1792 2343,1770 2343,1661 2407,1597 2775,1597 3065,1307 3123,1307 3303,1127 3303,763 2822,282 v1(2515,282)
  Bottom Layer w10: J2.42@2315.04,1791.97 v1(2429,1792)
PA1: J1.3 U1.41 | length 755.3
  Top Layer w10: v1(882.5,1147) 882.5,1193 837,1238.5 837,1425.37 862,1450.37 U1.41@905.3,1450.37
  Bottom Layer w10: v1(882.5,1147) 1017.5,1147 1030,1159.5 1030,1258.28 1061.33,1289.61 J1.3@1144.96,1289.61
PA3: J1.44 U1.47 | length 774.4
  Top Layer w10: U1.47@1025.99,1310 1025.99,1356.43 v1(1027.78,1358.22)
  Layer 1 w10: v1(1027.78,1358.22) 1049,1337 1242.5,1337 1255,1349.5 1255,1509 1316.5,1570.5 1316.5,1666.05 v1(1381,1730.55)
  Bottom Layer w10: J1.44@1330,1730.55 v1(1381,1730.55)
PA5: J1.46 U1.51 | length 501.8
  Top Layer w10: U1.51@1104.73,1310 1104.73,1343.73 1119,1358 1119,1543.56 v1(1243,1667.56)
  Bottom Layer w10: v1(1243,1667.56) J1.46@1330,1667.56
PA7: J1.48 U1.53 | length 440.9
  Top Layer w10: U1.53@1144.1,1310 1144.1,1530.6 v1(1222.57,1609.07)
  Bottom Layer w10: v1(1222.57,1609.07) 1298,1609.07 1302.5,1604.57 J1.48@1330,1604.57
PA9: J1.51 P2.1 U1.120 | length 2795.9
  Top Layer w10: v1(1753,1992) 1843.94,1992 1853.5,2001.56 U1.120@1914.39,2001.56 1953.94,2005.5 2056,2005.5 2119,1942.5 2119,817.5 v1(2188.5,748)
  Layer 1 w10: v1(1279,1498) 1332.5,1551.5 1332.5,1616.67 1707.83,1992 v1(1753,1992) ; P2.1@2175,350 2175,734.5 v1(2188.5,748)
  Bottom Layer w10: v1(1279,1498) 1291.08,1510.08 J1.51@1330,1510.08
PA10: J1.52 P2.2 U1.121 | length 3718
  Top Layer w10: U1.121@1914.39,2021.24 U1.121@1930,2021.24 ; P2.2@2075,350 2075,458 2020,513 2020,838 2091,909 v1(2091,1145) ; U1.121@1930,2021.24 1930.38,2021.24 1930.38,2021.5 2012.5,2021.5 v1(2024,2033) 1989,2033 1978,2022 1930.76,2022 U1.121@1930,2021.24
  Layer 1 w10: v1(1388,1561.17) 1668.83,1842 1710,1842 ; v1(2024,2033) 2003,2012 1867.5,2012 ; v1(2091,1145) 1921.5,1145 1894,1172.5 1618.5,1172.5 1562,1229 1434,1229 1418,1245 1418,1446 1403,1461 1403,1535 1710,1842 ; 1710,1842 1815,1947 ; 1710,1842 1726.5,1842 1815,1930.5 1815,1947 ; 1815,1947 1815,1959.5 ; 1815,1959.5 1815,1963.05 1863.95,2012 1867.5,2012 ; 1815,1959.5 1867.5,2012
  Bottom Layer w10: J1.52@1330,1478.58 1377,1478.58 1378.08,1479.66 1378.08,1560 1379.26,1561.17 v1(1388,1561.17)
PA11: J1.53 R11.1 U1.122 | length 2811.5
  Top Layer w10: v1(434,833.06) 459,833.06 R11.1@460.06,880 ; v1(1830,2015.5) 1855.43,2040.93 U1.122@1914.39,2040.93
  Layer 1 w10: v1(434,833.06) 434,1365 530,1461 677,1461 730,1408 730,1257.5 742.5,1245 897,1245 915,1263 962,1263 1019,1320 1290.5,1320 1303,1332.5 1303,1423 v1(1279,1447)
  Layer 2 w10: v1(1279,1447) 1309.46,1447 1830,1967.54 v1(1830,2015.5)
  Bottom Layer w10: v1(1279,1447) 1279.09,1447.09 J1.53@1330,1447.09
PA12: J1.54 R12.1 U1.123 | length 3357.8
  Top Layer w10: U1.123@1914.39,2060.61 1963.61,2060.61 v1(1964,2061)
  Layer 1 w10: v1(1380.96,1428.09) 1364.5,1444.55 1364.5,1583.17 1730.33,1949 1791.5,1949 1792.5,1950 1792.5,2108.52 1805,2121.02 1903.98,2121.02 v1(1964,2061)
  Layer 2 w10: v1(823.5,872) 823.5,479.9 917.5,385.9 929.1,385.9 997,318 1030,318 1331.5,619.5 1331.5,1395 1364.59,1428.09 v1(1380.96,1428.09)
  Bottom Layer w10: R12.1@620,910 785.5,910 v1(823.5,872) ; J1.54@1330,1415.59 1368.46,1415.59 v1(1380.96,1428.09)
PB2: J1.55 U1.58 U6.6 | length 4522.2
  Top Layer w10: v1(416,3265) U6.6@452.99,3265 ; v1(1242.52,1237.62) U1.58@1242.52,1310
  Layer 2 w10: v1(1242.52,1237.62) 1242.52,1347.52 v1(1279.09,1384.09)
  Bottom Layer w10: v1(416,3265) 58,2907 58,890 139,809 505,809 530,834 530,1036 542.5,1048.5 1267.5,1048.5 1288,1069 1288,1192.14 v1(1242.52,1237.62) ; v1(1279.09,1384.09) J1.55@1330,1384.09
PB6: J1.24 U1.164 U6.1 | length 2930.8
  Top Layer w10: v1(103,3340) 103,3350.5 117.5,3365 U6.1@140,3365 ; U1.164@1222.84,2319.09 v1(1222.84,2381.16)
  Layer 1 w10: v1(103,3340) 869,3340 926.5,3282.5 1372.5,3282.5 1385,3270 1385,2645 1213,2473 1213,2391 v1(1222.84,2381.16) 1162,2320.33 1162,2023.02 v1(1090,1951.02)
  Bottom Layer w10: v1(1090,1951.02) J1.24@1144.96,1951.02
PB10: J2.2 U1.79 | length 803.2
  Top Layer w10: U1.79@1655.91,1310 v1(1655.91,1375)
  Layer 2 w10: v1(1655.91,1375) 1621,1340.09 1621,1221.42 1654.42,1188 2041.64,1188 2059.61,1205.97 2059.61,1237.61 v1(2079,1257)
  Bottom Layer w10: v1(2079,1257) 2079.46,1256.54 J2.2@2130,1256.54
PB11: J2.1 U1.80 | length 558.4
  Top Layer w10: U1.80@1675.59,1310 1675.59,1248.5 v1(1688.09,1236)
  Layer 1 w10: v1(1688.09,1236) 1770.08,1236 1795.2,1261.12 1870.42,1261.12 v1(1894,1237.54)
  Bottom Layer w10: v1(1894,1237.54) 1920.96,1210.58 2061.76,1210.58 2076.22,1225.04 J2.1@2130,1225.04
PB13: J2.5 U1.93 | length 344.1
  Top Layer w10: U1.93@1914.39,1470.06 1987.06,1470.06 v1(2012,1495)
  Bottom Layer w10: v1(2012,1495) 2012,1395.02 2056,1351.02 J2.5@2130,1351.02
PB14: J2.6 U1.94 | length 378.8
  Top Layer w10: v1(1855,1480) 1864.74,1489.74 U1.94@1914.39,1489.74
  Layer 1 w10: v1(1855,1480) 1982,1480 v1(2079,1383)
  Bottom Layer w10: v1(2079,1383) 2079.48,1382.52 J2.6@2130,1382.52
PB15: J2.7 U1.95 | length 304.6
  Top Layer w10: U1.95@1914.39,1509.43 1963.57,1509.43 v1(1964,1509)
  Bottom Layer w10: v1(1964,1509) 1973.5,1518.5 2030,1518.5 2043,1505.5 2043,1434.5 2063.48,1414.02 J2.7@2130,1414.02
PC4: J1.49 U1.54 | length 682.6
  Top Layer w10: v1(1144,1185.5) 1163.78,1205.28 U1.54@1163.78,1310
  Layer 2 w10: v1(1144,1185.5) 1144,1514.93 1214.64,1585.57 v1(1254,1585.57)
  Bottom Layer w10: v1(1254,1585.57) 1279,1585.57 1291.5,1573.07 J1.49@1330,1573.07
PC5: J1.50 U1.55 | length 347.1
  Top Layer w10: U1.55@1183.47,1310 1183.47,1379.47 1240.28,1436.28 1240.28,1527.86 v1(1266.5,1554.07)
  Bottom Layer w10: v1(1266.5,1554.07) 1279,1541.57 J1.50@1330,1541.57
PC10: J1.40 U1.139 | length 680.9
  Top Layer w10: v1(1690,2234) 1714.96,2258.96 U1.139@1714.96,2319.09
  Layer 2 w10: v1(1430.54,1856.54) 1524,1950 1524,2068 v1(1690,2234)
  Bottom Layer w10: J1.40@1330,1856.54 v1(1430.54,1856.54)
PC12: J1.38 U1.141 | length 780.6
  Top Layer w10: v1(1675.59,2269) U1.141@1675.59,2319.09
  Layer 1 w10: v1(1549.53,1919.53) 1786.03,2156.03 1786.03,2188.97 1706,2269 v1(1675.59,2269)
  Bottom Layer w10: J1.38@1330,1919.53 v1(1549.53,1919.53)
PD2: J1.37 U1.144 | length 769.4
  Top Layer w10: v1(1604.5,2416.5) 1616.54,2404.46 U1.144@1616.54,2319.09
  Layer 2 w10: v1(1480,1951.02) 1503.87,1974.89 1503.87,2315.87 v1(1604.5,2416.5)
  Bottom Layer w10: J1.37@1330,1951.02 v1(1480,1951.02)
PE2: J1.20 U1.1 | length 679.6
  Top Layer w10: v1(855,2233) 859.78,2237.78 U1.1@905.3,2237.78
  Layer 1 w10: v1(855,2233) 889,2199 889,1911.6 966.1,1834.5 v1(1086,1834.5)
  Bottom Layer w10: v1(1086,1834.5) 1095.46,1825.04 J1.20@1144.96,1825.04
PE3: J1.19 U1.2 | length 767.6
  Top Layer w10: U1.2@905.3,2218.09 967.5,2218.09 v1(969.41,2220)
  Layer 1 w10: v1(969.41,2220) 1054.5,2220 1087.22,2187.28 1087.22,2041.99 1058.5,2013.27 1058.5,1936.52 1067.5,1927.52 1166.48,1927.52 1172,1922 1172,1818 v1(1196,1794)
  Bottom Layer w10: J1.19@1144.96,1793.54 1195.54,1793.54 v1(1196,1794)
PE4: J1.18 U1.3 | length 906.5
  Top Layer w10: v1(832.5,2198) 832.91,2198.41 U1.3@905.3,2198.41
  Layer 1 w10: v1(832.5,2198) 745,2110.5 745,1845 759.5,1830.5 768.5,1830.5 808,1791 1053,1791 v1(1094,1750)
  Bottom Layer w10: v1(1094,1750) 1106.05,1762.05 J1.18@1144.96,1762.05
PE5: J1.17 U1.4 | length 798.5
  Top Layer w10: U1.4@905.3,2178.72 1027.28,2178.72 v1(1039.78,2191.22)
  Layer 1 w10: v1(1039.78,2191.22) 1071.22,2159.78 1071.22,2101.48 1042.5,2072.76 1042.5,1924.02 1055,1911.52 1124.95,1911.52 1156,1880.48 1156,1758.05 v1(1196,1718.05)
  Bottom Layer w10: J1.17@1144.96,1730.55 1183.5,1730.55 v1(1196,1718.05)
PE6: J1.16 U1.5 | length 745
  Top Layer w10: v1(855,2163) 858.96,2159.04 U1.5@905.3,2159.04
  Layer 2 w10: v1(855,2163) 1000.15,2163 1019,2144.15 1019,1989.5 1026.5,1982 1026.5,1908 1059,1875.5 1059,1802 1070,1791 1070,1733 v1(1094,1709)
  Bottom Layer w10: v1(1094,1709) 1103.94,1699.06 J1.16@1144.96,1699.06
PF6: J1.14 U1.24 U6.7 | length 2411.8
  Top Layer w10: U6.7@452.99,3315 v1(587,3315) ; U1.24@905.3,1785.02 923.99,1785.15 1030,1785.15 1043.5,1771.65 v1(1043.5,1755.6)
  Layer 1 w10: v1(1043.5,1755.6) 1068.5,1730.6 1068.5,1674.06 v1(1094,1648.56)
  Layer 2 w10: v1(587,3315) 889,3013 889,2245.46 952.23,2182.23 1014.77,2182.23 1119.13,2077.87 1119.13,1673.69 v1(1094,1648.56)
  Bottom Layer w10: v1(1094,1648.56) 1106.5,1636.06 J1.14@1144.96,1636.06
PF7: J1.13 U1.25 U6.3 | length 2399
  Top Layer w10: v1(103,3265) U6.3@140,3265 ; v1(779,1785.5) 818.43,1785.5 838.59,1765.34 U1.25@905.3,1765.34 936.18,1765.34 940,1769.15 978.85,1769.15 v1(1043,1705)
  Layer 2 w10: v1(103,3265) 126.5,3241.5 324.5,3241.5 719.08,2846.92 719.08,1845.42 v1(779,1785.5)
  Bottom Layer w10: v1(1043,1705) 1043,1704.5 1070,1677.5 1070,1605.57 1071,1604.57 J1.13@1144.96,1604.57
PF8: J1.12 U1.26 U6.5 | length 2135.2
  Top Layer w10: U6.5@452.99,3215 v1(563,3215) ; U1.26@905.3,1745.65 v1(955.28,1745.65)
  Layer 2 w10: v1(563,3215) 757,3021 757,1943.93 765.05,1935.88 773.06,1935.88 788.94,1920 788.94,1911.98 792.6,1908.33 802,1908.33 815.33,1895 815.33,1885.6 v1(955.28,1745.65)
  Bottom Layer w10: v1(955.28,1745.65) 1005.35,1745.65 1018.5,1732.5 1018.5,1609.57 1055,1573.07 J1.12@1144.96,1573.07
PF9: J1.11 U1.27 U6.2 | length 2751.9
  Top Layer w10: U6.2@140,3315 167.5,3315 182,3300.5 v1(182,3285) ; v1(820.42,1688.47) 820.42,1688.58 v1@820.42,1699.39 ; U1.27@905.3,1725.97 845.42,1725.97 ; v1@820.42,1699.39 832.92,1712.68 ; v1@820.42,1699.39 822,1700.97 831.89,1700.97 832.92,1702 832.92,1712.68 ; 832.92,1712.68 832.92,1713.47 845.42,1725.97 ; 832.92,1712.68 845.42,1725.97
  Layer 1 w10: v1(182,3285) 153,3256 153,2637 729,2061 729,1780 v1@820.42,1688.58 ; v1(820.42,1688.47) 860.32,1728.37 860.32,1738.69 876.53,1754.9 876.53,1769.58 878.95,1772 988,1772 1002.5,1757.5 1002.5,1702.56 1163.49,1541.57 v1(1221,1541.57)
  Bottom Layer w10: J1.11@1144.96,1541.57 v1(1221,1541.57)
PG3: J2.13 J3.37 U1.107 | length 3605.4
  Top Layer w10: v1(960.04,254.04) J3.37@960.04,295 ; U1.107@1914.39,1745.65 1989.22,1745.65 v1(2001.87,1733) ; v1(2186,1602.99) 2202,1586.99 2330,1586.99 2343,1573.99 v1(2343,1145)
  Layer 2 w10: v1(2001.87,1733) 2098.99,1733 2139.13,1692.86 2139.13,1649.86 v1(2186,1602.99)
  Bottom Layer w10: v1(960.04,254.04) 936,230 936,164.5 967.5,133 2154.5,133 2504,482.5 2504,984 v1(2343,1145) ; J2.13@2130,1602.99 v1(2186,1602.99)
PG13: J1.33 U1.156 | length 452.6
  Top Layer w10: U1.156@1380.32,2319.09 v1(1380.32,2369)
  Layer 2 w10: v1(1279,2064.5) 1335,2120.5 1335,2323.68 v1(1380.32,2369)
  Bottom Layer w10: v1(1279,2064.5) 1291.51,2077.01 J1.33@1330,2077.01
PG14: J1.32 U1.157 | length 287.4
  Top Layer w10: v1(1360.63,2269) U1.157@1360.63,2319.09
  Layer 2 w10: v1(1360.63,2269) 1360.63,2141.87 v1(1393.5,2109)
  Bottom Layer w10: J1.32@1330,2108.5 1393,2108.5 v1(1393.5,2109)
PH6: J2.8 J3.38 U1.83 | length 2566.4
  Top Layer w10: J3.38@940.36,295 v1(940.36,336) ; U1.83@1734.65,1310 v1(1734.65,1359.98) ; v1(2027.92,889) 2055.5,916.58 2055.5,1435 v1(2066.5,1446)
  Layer 2 w10: v1(1734.65,1359.98) 1775.63,1319 1939.5,1319 v1(2066.5,1446)
  Bottom Layer w10: v1(940.36,336) 964.36,312 1623,312 2027.92,716.92 v1(2027.92,889) ; v1(2066.5,1446) 2066.99,1445.51 J2.8@2130,1445.51
PH7: J2.9 J3.39 U1.84 | length 3453.1
  Top Layer w10: J3.39@920.67,295 920.67,216.85 v1(969.52,168) ; v1(1754.33,1260.02) U1.84@1754.33,1310 ; v1(2181,1477.01) 2181,1012 2271,922 2271,676.5 v1(2295.75,651.75)
  Layer 1 w10: v1(969.52,168) 979.54,157.98 2183.98,157.98 2295.75,269.75 v1(2295.75,651.75) ; v1(1754.33,1260.02) 1775.13,1280.81 1803.36,1295 1816.31,1322 2117.5,1322 2181,1385.5 v1(2181,1477.01)
  Bottom Layer w10: J2.9@2130,1477.01 v1(2181,1477.01)
PI3: J2.41 J3.36 U1.134 | length 8369.2
  Top Layer w10: v1(924,414) 979.73,358.27 J3.36@979.73,295 ; U1.134@1813.39,2319.09 1813.39,2357.5 1828.27,2372.39 2087.61,2372.39 2142.5,2317.5 2142.5,2170.5 2155,2158 2173,2158 2232,2099 v1(2232,1823.46)
  Layer 1 w10: v1(924,414) 853.5,414 773,333.5 773,45 791,27 3495,27 3513,45 3513,1620 v1(3498,1635)
  Bottom Layer w10: v1(2232,1823.46) J2.41@2315.04,1823.46 2354.54,1823.46 2359,1819 2527,1819 2582,1874 2847,1874 3017.5,1703.5 3017.5,1440.5 3030,1428 3374,1428 3411,1391 3411,1098 3412,1097 3479,1097 3498,1116 v1(3498,1635)
PI8: J2.40 J3.35 U1.7 | length 5928.3
  Top Layer w10: v1(671,1843) 705,1843 718,1856 718,2034 765.23,2081.23 823.57,2081.23 862,2119.67 U1.7@905.3,2119.67 ; v1(999,248) v1@999.41,248.41 ; v1(999.41,182.5) v1@999.41,248.41 ; J3.35@999.41,295 v1@999.41,248.41 ; v1(2307,775) 2439,907 2439,1516.5 2450.51,1528.01 2450.51,1595.99 2429.02,1617.48 2380,1617.48 2293.98,1703.51 2293.98,1745.98 v1(2391,1843)
  Layer 2 w10: v1(671,1843) 551,1723 551,284 723,112 1081.5,112 1102,132.5 1102,231.5 1067.5,266 1017,266 v1(999,248)
  Bottom Layer w10: v1(999.41,182.5) 1003.91,178 1260,178 1364,282 1687,282 2180,775 v1(2307,775) ; J2.40@2315.04,1854.96 2379.04,1854.96 v1(2391,1843)
RESET: C12.1 J1.10 J3.40 P1.5 R6.1 RST.1 U1.31 | length 10456.6
  Top Layer w10: v1(807.92,1634.73) 820.42,1647.22 U1.31@905.3,1647.22 ; v1(900.99,856.01) 894.45,849.48 894.45,571.53 ; P1.5@1270,3375 1312.5,3332.5 1398.5,3332.5 1411,3345 1411,3460 1410,3461 41,3461 24,3444 24,307.5 37.5,294 413,294 483,364 483,578 574,669 796.99,669 894.45,571.53 ; RST.1@2995,162.91 2915.09,162.91 2913,165 C12.1@2835.06,165 R6.1@2720.06,165 2572,165 2511,104 930.99,104 900.99,134 J3.40@900.99,295 900.99,383.97 900.5,384.45 ; 894.45,571.53 894.45,390.5 900.5,384.45 ; 894.45,571.53 900.5,565.49 900.5,384.45
  Layer 1 w10: v1(807.92,1634.73) 868.47,1695.28 979.72,1695.28 1094,1581 v1(1094,1510.08)
  Layer 2 w10: v1(807.92,1634.73) 807.92,949.08 v1(900.99,856.01)
  Bottom Layer w10: v1(1094,1510.08) J1.10@1144.96,1510.08
VBAT: D1.2 J1.29 | length 2699.6
  Top Layer w10: D1.2@673.74,1007.6 857,1007.6 v1(882,982.6)
  Layer 2 w10: v1(882,982.6) 997,867.6 997,584.5 1024,557.5 1136.5,557.5 1149,570 1149,997 1104,1042 1104,1098.5 1167.5,1162 1167.5,1443.5 1252,1528 1289,1528 1290,1529 1290,1717 1245,1762 1180,1762 1160,1782 1160,1889 1234,1963 v1(1234,2107.5)
  Bottom Layer w10: J1.29@1144.96,2108.5 1233,2108.5 v1(1234,2107.5)
VCC: R16.2 R20.2 R21.2 | length 1290.6
  Layer 2 w10: v1(392.5,1048) 405,1060.5 v1(405,1905.5)
  Bottom Layer w10: R21.2@300.06,2110 430,2110 ; v1(392.5,1048) 405.06,1035.44 R16.2@405.06,1000 ; v1(405,1905.5) 405,2085 430,2110 ; R20.2@459.94,2110 430,2110
VCC3.3: 3.3V.1 C31.2 C32.2 C37.2 C38.2 C39.2 C40.2 C41.2 C42.2 C43.2 C44.1 C45.1 MOS1.2 P1.4 R6.2 R8.1 R9.1 R17.1 R18.2 R19.1 U2.5 U3.1 U3.3 U3.9 U3.14 U3.27 U3.43 U3.49 U5.8 U6.8 WKUP.2 | length 12749.5
  Top Layer w10: v1(122,2395) 3.3V.1@75,2395 154,2316 v1(154,2098) ; C42.2@200.06,1370 227.5,1370 ; v1(216,2655) 376.39,2815.39 376.39,3341.39 400,3365 U6.8@452.99,3365 562,3365 595,3398 790,3398 818,3370 U5.8@930,3370 1050,3370 1100,3420 1325,3420 P1.4@1370,3375 ; v1(240,1407.13) 240,1382.5 227.5,1370 ; v1(496,1365) 430.06,1365 C43.2@430.06,1370 227.5,1370 ; R19.1@1125.06,710 1155,710 1175,730 1175,845 1190,860 C31.2@1230.06,860 1265,860 1300,895 1370,895 1405,860 C32.2@1440.06,860 1440.06,935.93 1440.57,936.43 ; U2.5@1455,965 1455,950.87 ; v1(2059.5,763) 2059.5,757.5 2078.54,738.46 2126.75,738.46 2249.42,615.79 MOS1.2@2267.4,615.79 2383,615.79 2399.3,632.09 WKUP.2@2515,632.09 2515,1203.94 U3.27@2586.06,1275 2586.06,1331.94 v1(2586,1332) ; R6.2@2720.06,255 2667.5,255 2563,359.5 2563,871 2681,989 2948.5,989 2967,1007.5 2967,1189.62 v1(2995.51,1218.13) U3.14@2995.51,1275 v1(2995.51,1332) ; v1(3152.99,1356) U3.9@3152.99,1275 3152.99,1122 3058.5,1027.51 U3.43@3058.5,802.56 3058.5,746.5 3116,689 3190,689 3247.48,746.48 U3.49@3247.48,802.56 ; U3.3@3341.97,1275 3341.97,1318.94 ; v1(3341.97,1356) 3341.97,1318.94 ; U3.1@3404.96,1275 3404.96,1330.01 3403,1331.97 3355,1331.97 3341.97,1318.94 ; 1440.57,936.43 1455,950.87 ; 1440.57,936.43 v1(1455,922) 1455,950.87
  Layer 1 w10: v1(496,1365) 496,1356.5 519.5,1333 519.5,1247.52 845.02,922 v1(1455,922) ; v1(2586,1332) 2609.63,1308.37 2971.88,1308.37 v1(2995.51,1332) ; v1(2995.51,1218.13) 3046.89,1269.51 3066.5,1269.51 v1(3152.99,1356) v1(3341.97,1356)
  Layer 2 w10: v1(1455,922) 1563,814 2008.5,814 v1(2059.5,763)
  Bottom Layer w10: v1(122,2395) 132,2385 254,2385 ; v1(216,2655) C44.1@279.94,2655 279.94,2607.5 253,2580.56 253,2386 254,2385 ; v1(240,1407.13) 230.06,1397.19 ; R8.1@396.07,2385.59 342.59,2385.59 342,2385 R9.1@289.94,2385 254,2385 ; R17.1@450.06,1265 404,1265 314,1355 R18.2@230.06,1355 230.06,1397.19 ; C45.1@624.94,2015 592,2015 574.5,2032.5 574.5,2088.5 442,2221 277,2221 v1(154,2098) 110,2054 C37.2@110,1975 217.5,1975 231.38,1961.12 C38.2@231.38,1771.93 ; C41.2@714.94,1725 654,1725 609,1770 C40.2@549.94,1770 C39.2@394.94,1770 313.93,1770 312,1771.93 C38.2@231.38,1771.93 ; 230.06,1397.19 230.06,1604.94 195,1640 195,1770.93 196,1771.93 C38.2@231.38,1771.93
VCC3.3M: C13.2 C14.2 C15.2 C16.2 C17.2 C18.2 C19.2 C20.2 C21.2 C22.2 C23.2 C24.2 C25.2 C26.2 C27.2 D1.1 R3.2 R5.2 R8.2 R9.2 U1.15 U1.23 U1.36 U1.49 U1.62 U1.72 U1.82 U1.91 U1.103 U1.114 U1.127 U1.136 U1.149 U1.159 U1.172 | length 15117.9
  Top Layer w10: v1(356,2189) 356,2482.5 378.5,2505 402.56,2505 ; C26.2@380.06,2130 380.06,2482.5 402.56,2505 ; v1(480,2553) C25.2@480,2505 402.56,2505 ; D1.1@673.74,1082.4 673.74,1138 675,1139.26 675,1160 ; R3.2@675,1195.06 675,1160 ; v1(832.56,1171.5) 820.06,1159 676,1159 675,1160 ; U1.36@905.3,1548.8 v1(967,1548.8) 977.5,1548.8 1033.8,1548.8 1068,1583 1068,1791.71 1055,1804.71 ; U1.23@905.3,1804.71 1055,1804.71 ; U1.15@905.3,1962.19 919,1962.19 919,1959 950,1959 958.5,1950.5 959.5,1950.5 979,1970 979,1977 1002.89,2000.89 1002.89,2036.52 1072,2105.63 1072,2268.36 1065.36,2275 U1.172@1065.36,2319.09 1065.36,2362.67 1049,2379.03 1049,2609 1050,2610 R5.2@1085.06,2610 1085.06,2645 1101.06,2661 v1(1210,2661) ; v1(975.43,1535) v1(977.5,1532.93) 1049,1461.43 1049,1376.36 1065.36,1360 U1.49@1065.36,1310 ; U1.159@1321.26,2319.09 1321.26,2216.74 1434,2104 1434,1984 1435,1983 1505,1983 1518.11,1996.11 1518.11,2171.34 ; C17.2@1325.06,1165 1325.06,1235 1321.26,1238.8 U1.62@1321.26,1310 1321.26,1458.02 1377.24,1514 1437,1514 1474,1477 1546.47,1477 1548,1475.47 ; v1(1518,1260) 1518.11,1260.11 U1.72@1518.11,1310 1518.11,1348.11 ; U1.149@1518.11,2319.09 1518.11,2171.34 ; U1.82@1714.96,1310 1714.96,1250.04 v1(1752.5,1212.5) ; U1.136@1774.02,2319.09 1774.02,2379.81 v1(1827.5,2433.29) ; v1(1806.96,1882.5) v1@1806.01,1883.45 ; v1(1841,1897) 1854.55,1883.45 ; U1.91@1914.39,1430.69 1963.69,1430.69 v1(1964,1431) ; U1.103@1914.39,1666.91 1963.91,1666.91 v1(1964,1667) ; U1.114@1914.39,1883.45 1854.55,1883.45 ; U1.127@1914.39,2139.35 v1(1964.37,2139.35) ; 1055,1804.71 1082,1804.71 1144.71,1742 1222,1742 1379.33,1584.67 1500.33,1584.67 1548,1537 1548,1475.47 ; 1518.11,1348.11 1518.11,1349 1521.5,1352.39 1521.5,1401.5 1522,1402 ; 1518.11,1348.11 1522,1352 1522,1402 ; 1518.11,2171.34 v1@1806.01,1883.45 ; 1522,1402 1548,1428 1548,1475.47 ; v1@1806.01,1883.45 1854.55,1883.45
  Layer 1 w10: v1(652.91,2661) v1(1210,2661)
  Layer 2 w10: v1(940,1235) 961,1256 961,1329.93 960,1330.93 936.07,1330.93 925,1342 925,1520 937.93,1532.93 v1(977.5,1532.93) ; v1(1806.96,1882.5) 1879.54,1882.5 1904.54,1857.5 1904.54,1726.46 v1(1964,1667) ; v1(1827.5,2433.29) 1953.36,2433.29 2046.12,2340.54 2046.12,2155.47 2030,2139.35 v1(1964.37,2139.35) 1905,2079.98 1905,1909.5 1892.5,1897 v1(1841,1897) ; v1(2490,2890) 2490,1945 v1(2610,1825)
  Bottom Layer w10: R9.2@289.94,2475 342,2475 342.59,2475.59 R8.2@396.07,2475.59 467.5,2475.59 480,2488.09 ; v1(356,2189) 300,2189 264,2153 264,1850 280,1834 495,1834 525,1864 ; v1(480,2553) 480,2488.09 ; v1(652.91,2661) 480,2488.09 ; v1(832.56,1171.5) 845.06,1184 C16.2@845.06,1235 v1(940,1235) ; C15.2@844.94,1535 953.2,1535 ; C14.2@845.06,1790 845.06,1745 832.06,1732 765,1732 752,1745 752,1784 719,1817 719,1880 705,1894 615,1894 ; C13.2@845.06,2010 731,2010 615,1894 ; v1(967,1548.8) 953.2,1535 ; v1(977.5,1532.93) v1(975.43,1535) 967,1535 953.2,1535 ; v1(1210,2661) 1469,2920 1705,2920 ; v1(1518,1260) 1544,1286 1544,1309.56 1544.5,1310.06 C18.2@1575,1310.06 1634,1310.06 1634.13,1309.94 C19.2@1695,1309.94 ; v1(1752.5,1212.5) 1695,1270 C19.2@1695,1309.94 ; v1(1827.5,2433.29) 1827.5,2563.5 1704,2687 1704,2919 1705,2920 ; v1(1964,1431) 1940,1455 ; v1(1964,1667) 1940,1643 1940,1455 ; v1(2490,2890) 2475,2905 ; v1(2610,1825) C27.2@2785,1825 ; C24.2@2655,2900 2495,2900 2490,2905 2475,2905 ; 525,1864 555,1894 615,1894 ; 525,1864 555,1834 615,1894 ; C19.2@1695,1309.94 1695,1418.5 1780.5,1504 1891,1504 1940,1455 ; 1705,2920 C20.2@1740,2920 C21.2@1949.94,2920 2060,2920 2065,2915 C22.2@2170,2915 2302,2915 2312,2905 C23.2@2434.94,2905 2475,2905